# Altium PCB Imu.PcbDoc
Units mm, origin at the board's own origin, x right, y up, seen from the top; angles counter-clockwise.
Board outline 28 x 21 mm, 2 copper layers (Top Layer, Bottom Layer); 8 components, 7 nets, 49 pads, 15 vias.
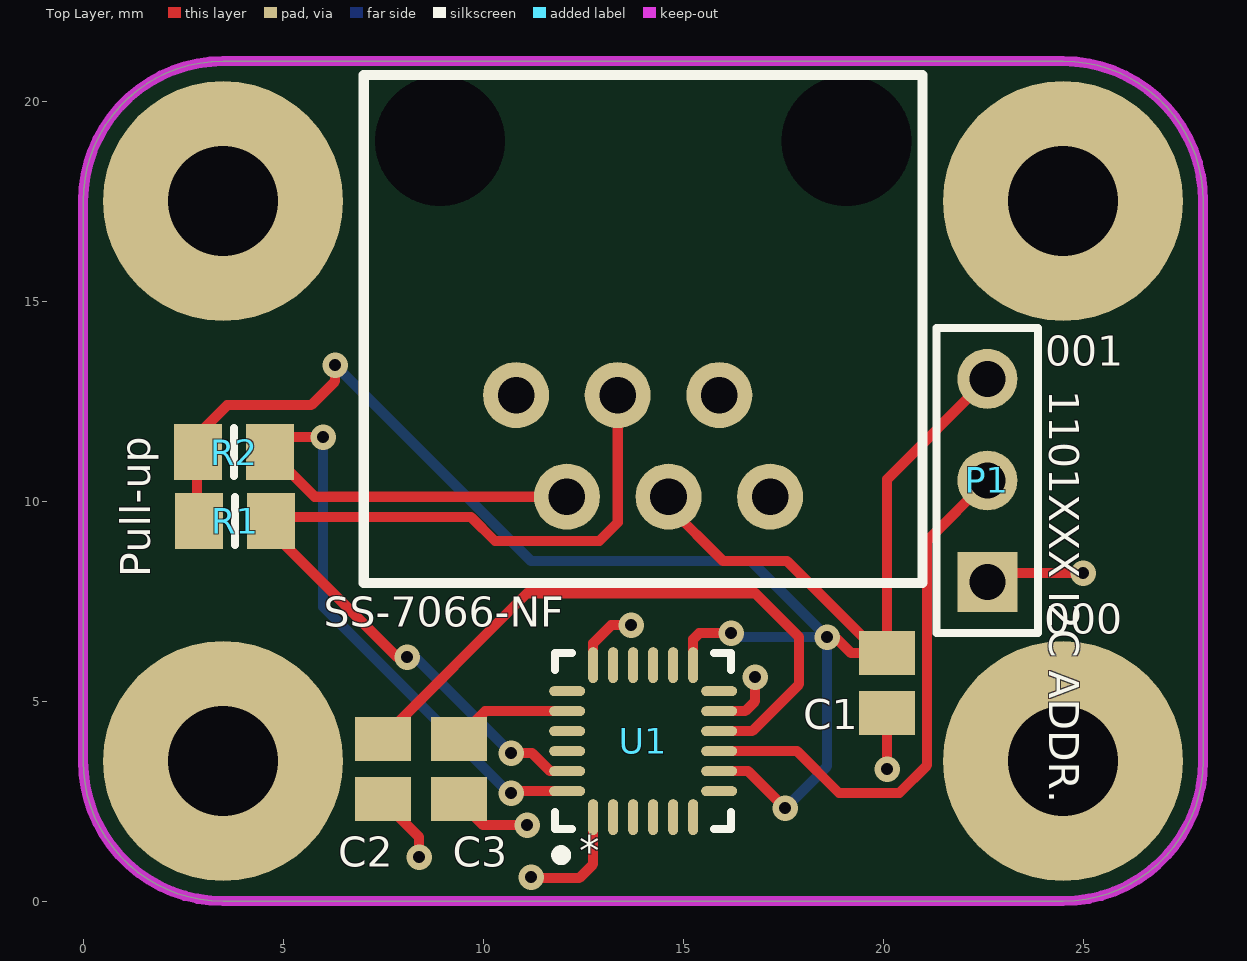
[diagram p0: Top Layer view]
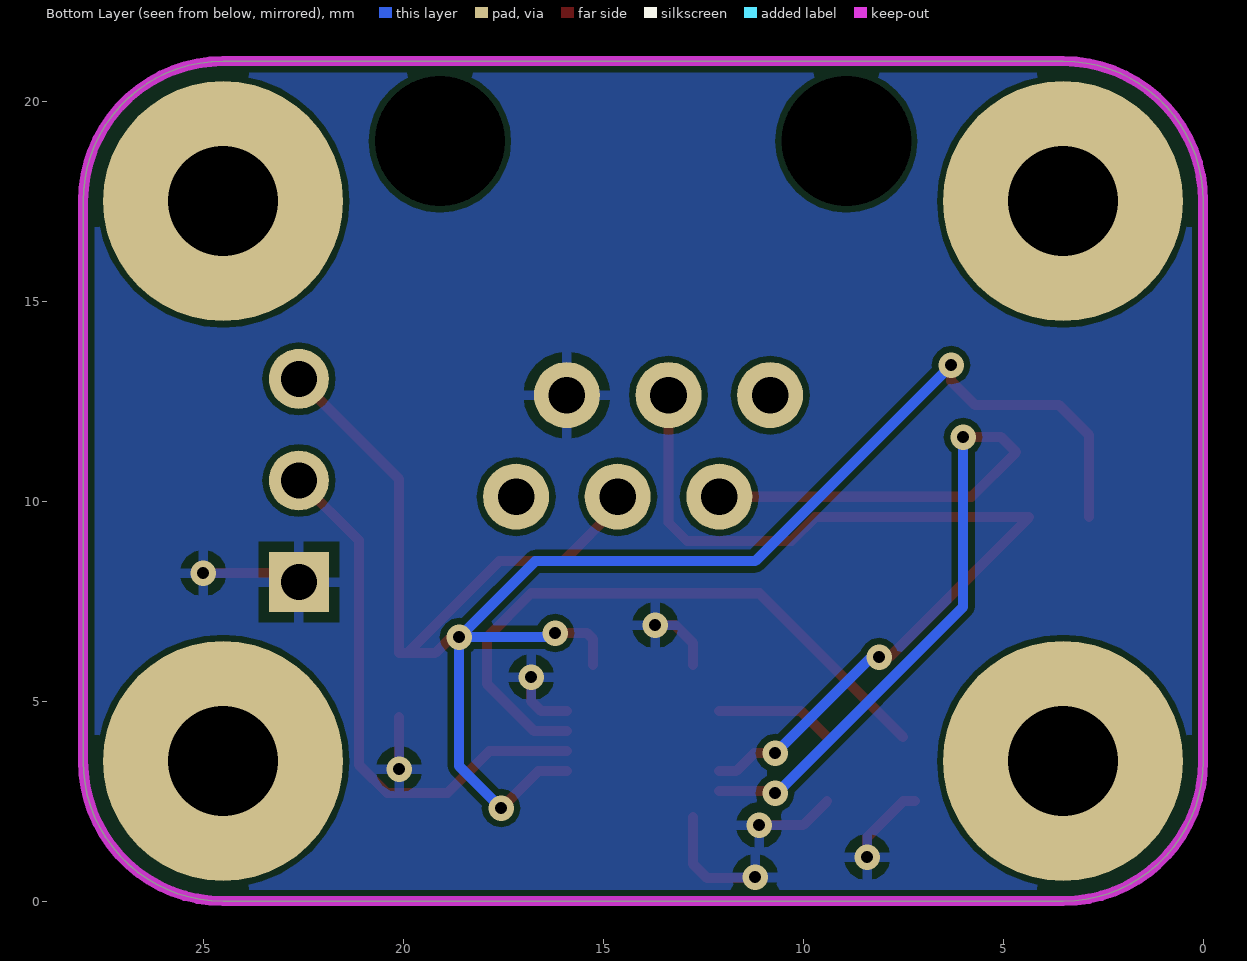
[diagram p1: Bottom Layer view, seen from below]

## Layer stack, top to bottom
Top Solder: solder mask 0.0102, Solder Resist, Dk 3.5
Top Layer: signal copper 0.0356
Dielectric 1: dielectric 0.32, FR-4, Dk 4.8
Bottom Layer: signal copper 0.0356
Bottom Solder: solder mask 0.0102, Solder Resist, Dk 3.5

## Board outline
0,3.5 0,17.5 cw(c3.5,17.5) 3.5,21 24.5,21 cw(c24.5,17.5) 28,17.5 28,3.5 cw(c24.5,3.5) 24.5,0 3.5,0 cw(c3.5,3.5)

## Design rules (kind name [scope] priority, off if disabled: settings)
Clearance [All] p1: gap=0.152 ignorepadtopadclearanceinfootprint=FALSE except(0: Arc-Hole Track-Hole SMDPad-Hole THPad-Hole Via-Hole Fill-Hole Poly-Hole Region-Hole Text-Hole)
HoleSize [All] p1: absolutevalues=TRUE maxlimit=3.5 minlimit=0.025 maxpercent=80.000 minpercent=20.000
MinimumSolderMaskSliver [All] p1: minsoldermaskwidth=0.1
PolygonConnect [All] p1: connectstyle=Relief reliefconductorwidth=0.254 reliefentries=4 polygonreliefangle="90 Angle" airgapwidth=0.254
RoutingVias [All] p1: holewidth=0.711 width=1.27 viastyle="Through Hole" minholewidth=0.711 minwidth=1.27 maxholewidth=0.711 maxwidth=1.27
SilkToSilkClearance [All] p1: silktosilkclearance=0.1
SilkToSolderMaskClearance [IsPad] p1: minsilkscreentomaskgap=0.1 clearancetoexposedcopper=TRUE
SolderMaskExpansion [All] p1: expansion=0.05
Width [All] p1: maxlimit=0.254 minlimit=0.254 preferedwidth=0.254
26 further rules are at their usual default settings.

## Components (designator, comment, footprint, x,y, rotation, side; value= is the part's Value field where it differs from the comment)
C1 "Cap 0.1uF" C0805 20.1,5.45 r90 top value=0.1F
C2 "Cap 0.1uF" C0805 7.5,3.3 r90 top value=0.1F
C3 "Cap 2.2nF" C0805 9.4,3.3 r270 top value=2.2nF
P1 "Header 3" HDR1X3 22.606,7.976 r90 top
R1 "Res 10K" 6-0805_N 3.8,9.5 r180 top value=10K
R2 "Res 10K" 6-0805_N 3.775,11.225 r180 top value=10K
SS-7066-NF "*" SS-7066-NF 19.08,19 r180 top
U1 "*" MPU6050 14,4 r90 top

## Footprints (in the part's own frame and the unit in brackets; to place one, negate y for a bottom-side part, rotate by r counter-clockwise, add the part's x,y. Pads: shape width x height; smd on the part's side, far side on the other; paste and mask are expansions set on the pad)
6-0805_N [mm] "Chip Resistor, Body 2.0x1.2mm, IPC Medium Density"
  rect 1.2x1.4 smd: 1(-0.9,0) 2(0.9,0)
  silkscreen extent 0,-0.6 0,0.6, body extent -1.07,-0.7 1.07,0.7, height 0.7
C0805 [mm] "Chip Capacitor, Body 2.0x1.3mm, IPC High Density"
  rect 1.1x1.4 smd: 1(-0.75,0) 2(0.75,0)
  body extent -1.1,-0.72 1.1,0.72, height 1.4
HDR1X3 [mm] "Connector; Header; 3 Position"
  rect 1.5x1.5 hole 0.9: 1(0,0)
  round 1.5 hole 0.9: 2(2.54,0) 3(5.08,0)
  silkscreen extent -1.27,-1.27 6.35,1.27, body extent -1.27,-1.27 6.35,1.27, height 9.5
MPU6050 [mm] "IMU"
  oval 0.9x0.25 smd mask+0.05: 1(-1.9,1.25) 2(-1.9,0.75) 3(-1.9,0.25) 4(-1.9,-0.25) 5(-1.9,-0.75) 6(-1.9,-1.25) 13(1.9,-1.25) 14(1.9,-0.75) 15(1.9,-0.25) 16(1.9,0.25) 17(1.9,0.75) 18(1.9,1.25)
  oval 0.25x0.9 smd mask+0.05: 7(-1.25,-1.9) 8(-0.75,-1.9) 9(-0.25,-1.9) 10(0.25,-1.9) 11(0.75,-1.9) 12(1.25,-1.9) 19(1.25,1.9) 20(0.75,1.9) 21(0.25,1.9) 22(-0.25,1.9) 23(-0.75,1.9) 24(-1.25,1.9)
  silkscreen extent -2.97,-2.2 2.2,2.2, body extent -2.02,-2.03 2.02,2.01, height 0.88
SS-7066-NF [mil]
  round 65 hole 36: 1(75,350) 2(125,250) 3(175,350) 4(225,250) 5(275,350) 6(325,250)
  round 0 hole 128: ""(0,0) ""(400,0)
  silkscreen extent -75,-65 475,435, body extent -55,-309 465,399, height 466

## Part data
C1 C2: "Capacitor 0.1uF", Supplier Part Number 1=478-1395-1-ND, LatestRevisionDate=29-May-2009, LatestRevisionNote="IPC-7351 Footprint Added.", PackageDescription="Chip Capacitor", PackageReference=C1206, Published=8-Jun-2000, Publisher="Altium Limited", Supplier 1=Digi-Key
C3: "Capacitor 2.2nF", Supplier Part Number 1=1276-1171-1-ND, LatestRevisionDate=29-May-2009, LatestRevisionNote="IPC-7351 Footprint Added.", PackageDescription="Chip Capacitor", PackageReference=C1206, Published=8-Jun-2000, Publisher="Altium Limited", Supplier 1=Digi-Key
P1: "Header, 3-Pin", Supplier Part Number 1=WM11221-ND, LatestRevisionDate=17-Jul-2002, LatestRevisionNote="Re-released for DXP Platform.", Publisher="Altium Limited", Supplier 1=Digi-Key
R1 R2: "Resistor 10K", Supplier Part Number 1=311-10.0KCRCT-ND, LatestRevisionDate=29-May-2009, LatestRevisionNote="IPC-7351 Footprint Added.", PackageDescription="Chip Resistor", PackageReference=J1-0603, Published=8-Jun-2000, Publisher="Altium Limited", Supplier 1=Digi-Key
SS-7066-NF: library part SS-7066-NF, "RJ12 Connector", Supplier Part Number 1=380-1043-ND, Supplier 1=Digi-Key
U1: library part MPU6050, "3 axis IMU", Supplier Part Number 1=1428-1007-1-ND, Supplier 1=Digi-Key

## Free pads (board coordinates)
  round 6 hole 2.75: 1(3.5,3.5) 1(3.5,17.5) 1(24.5,17.5) 1(24.5,3.5)

## Via types
v1: diameter 0.635, hole 0.3, Top Layer to Bottom Layer, 15 vias

## Nets (pads, with @x,y where several pads share a name; then routed paths per layer and width w, separated by ;. In a path a pad name is that pad's centre, name@x,y a point inside that pad or via, vN(x,y) a via of type N, cw(c..) or ccw(c..) an arc to the next point about the centre after c; other vN are vias at no path point)
CPOUT: C3.1 U1.20 | length 3
  Top Layer w0.254: C3.1@9.4,4.1 10.05,4.75 U1.20
GND: C1.1 C2.1 C3.2 P1.1 SS-7066-NF.2 U1.1 U1.11 U1.18 | length 13.6
  Top Layer w0.254: C2.1@7.2,2.5 7.5,2.5 8.4,1.6 v1(8.4,1.1) ; C3.2@9.4,2.5 10,1.9 v1(11.1,1.9) ; v1@11.2,0.575 12.4,0.575 12.75,0.925 U1.1 ; U1.18 12.75,6.45 13.2,6.9 v1(13.7,6.9) ; U1.11 16.55,4.75 16.8,5 v1(16.8,5.6) ; v1(20.1,3.3) C1.1@20.1,4.6 ; P1.1@23,7.96 23.24,8.2 v1(25,8.2)
  other v1: 11.2,0.6
NetP1_2: P1.2 U1.9 | length 13.7
  Top Layer w0.254: U1.9 17.85,3.75 18.897,2.703 20.403,2.703 21.1,3.4 21.1,9.01 P1.2
REGOUT: C2.2 U1.10 | length 16
  Top Layer w0.254: C2.2@7.5,4.1 11.097,7.697 16.803,7.697 17.9,6.6 17.9,5.425 16.725,4.25 U1.10
SCL: R1.1 SS-7066-NF.4 U1.23 | length 23
  Top Layer w0.254: v1(8.1,6.1) 7.85,6.1 4.35,9.6 9.7,9.6 10.295,9.005 12.905,9.005 13.365,9.465 SS-7066-NF.4 ; v1(10.7,3.7) 11.225,3.7 11.675,3.25 U1.23
  Bottom Layer w0.254: v1(8.1,6.1) 8.3,6.1 v1(10.7,3.7)
SDA: R2.1 SS-7066-NF.5 U1.24 | length 21.7
  Top Layer w0.254: v1(6,11.6) 5.05,11.6 R2.1 5.79,10.11 SS-7066-NF.5 ; v1(10.7,2.7) 10.7,2.725 10.725,2.75 U1.24
  Bottom Layer w0.254: v1(6,11.6) 6,7.356 10.656,2.7 v1(10.7,2.7)
VCC: C1.2 P1.3 R1.2 R2.2 SS-7066-NF.3 U1.8 U1.13 | length 49
  Top Layer w0.254: R1.2@2.85,9.6 2.85,11.65 3.6,12.4 5.7,12.4 6.3,13 v1(6.3,13.4) ; SS-7066-NF.3 14.635,9.865 16,8.5 17.6,8.5 C1.2@19.9,6.2 ; U1.13 15.25,6.55 15.4,6.7 v1(16.2,6.7) ; U1.8 16.625,3.25 v1(17.55,2.325) v1@17.55,2.3 ; v1(18.6,6.6) 18.8,6.6 19.2,6.2 C1.2@19.9,6.2 ; P1.3 20.1,10.55 C1.2 C1.2@19.9,6.2
  Bottom Layer w0.254: v1(6.3,13.4) 11.2,8.5 16.7,8.5 v1(18.6,6.6) ; v1(16.2,6.7) 16.3,6.6 v1(18.6,6.6) ; v1(17.55,2.325) 18.6,3.375 v1(18.6,6.6)
pads on no net: SS-7066-NF. SS-7066-NF.1 SS-7066-NF.6 U1.2 U1.3 U1.4 U1.5 U1.6 U1.7 U1.12 U1.14 U1.15 U1.16 U1.17 U1.19 U1.21 U1.22

## Polygon pours and split planes (outlines as drawn)
GND on Bottom Layer "GND" (solid, pour order 6): 0,3.5 0,17.5 cw(c3.5,17.5) 3.5,21 24.5,21 cw(c24.5,17.5) 28,17.5 28,3.5 cw(c24.5,3.5) 24.5,0 3.5,0 cw(c3.5,3.5)
no net on Bottom Layer "Bottom Layer-No Net" (solid, pour order 4): 4.5,-0.5

## Keep-outs
Keep-Out Layer:
  the board outline again, w0.254

## Silkscreen, mask and mechanical layers (free items; w line width, h text height)
Top Overlay:
  text "001" at 24.054,13.386 h0.75
  text "1101XXX I2C ADDR." at 24.155,12.776 h0.75 r270
  text "Pull-up" at 1.676,8.103 h0.75 r90
  text "000" at 24.028,6.68 h0.75